# EAGLE board NSL_CylonIII (EAGLE 5.11)
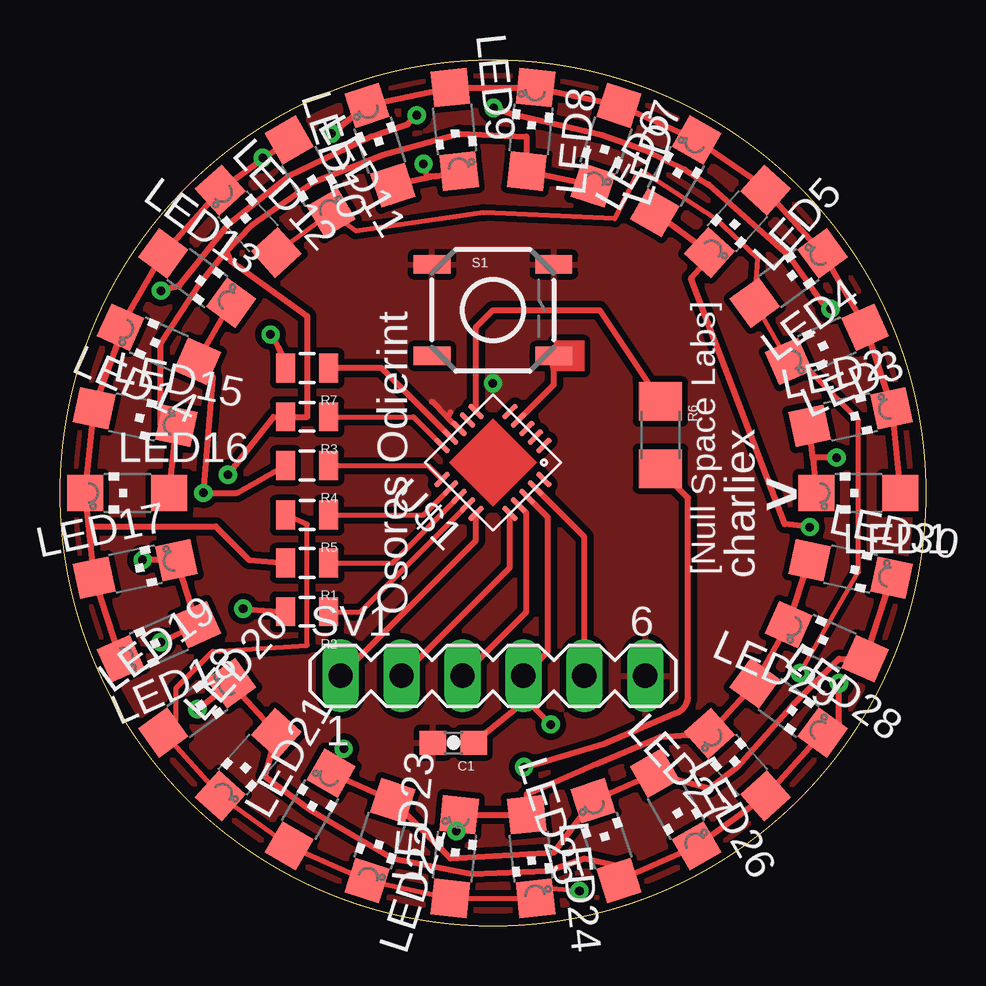
[diagram p0: board, top side]
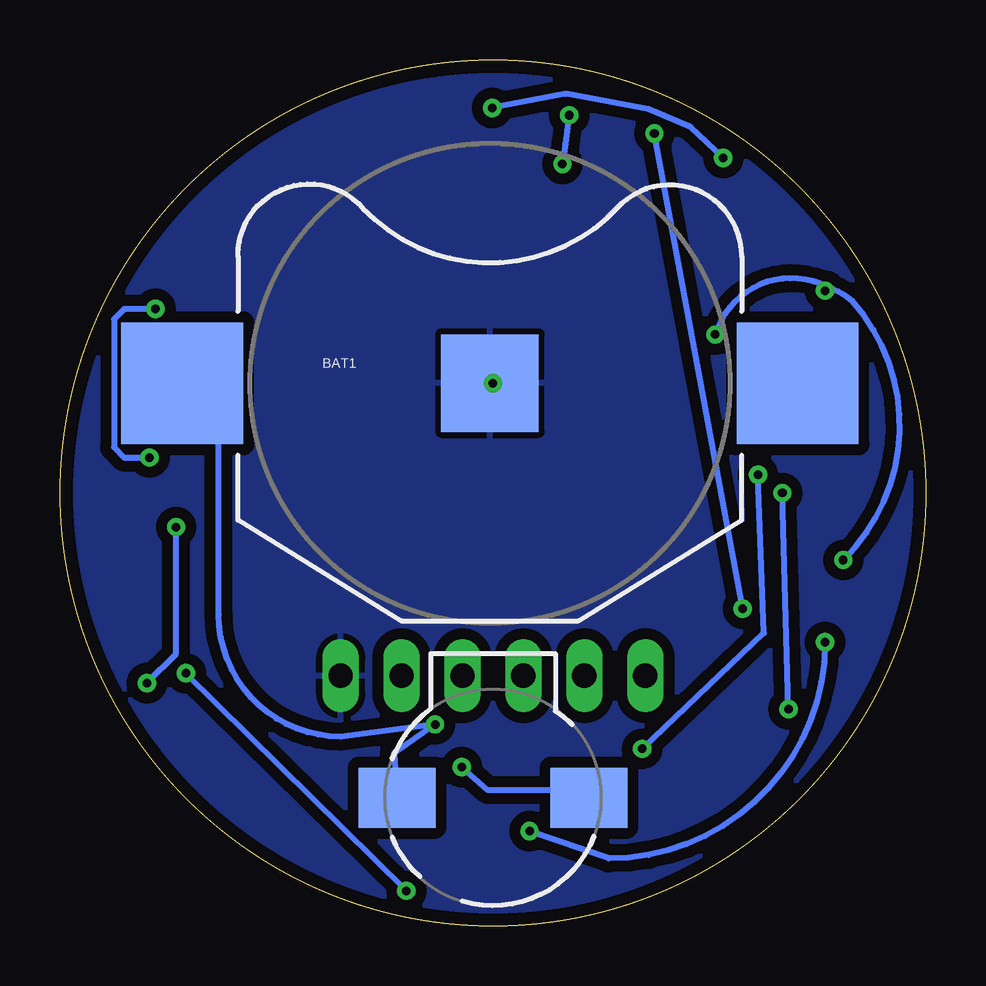
[diagram p1: board, bottom side, seen from below]

Size 36.1 x 36.1 mm. Coordinates in mm from the lower left corner, seen from the top.
Outline: circle at 18.05,18.05 radius 18.05
Copper layers (1*16): Top 0.0356mm / dielectric 1.5011mm / Bottom 0.0356mm
Design rules "SilverCircuits *": minimum track width 7mil, minimum drill 14mil, track to track 7mil, track to pad 7mil, pad to pad 7mil, via to via 7mil, smd to smd 0mil, copper to edge 20mil, drill to drill 8mil, minimum pad ring 10mil, minimum via ring 8mil, stop-mask expansion 4mil, vias tented up to drill 14mil, thermal gap 10mil
Net classes: 0 default: width 0.254 mm; 1 LED: width 0.203 mm

## Footprints (pad centres in the part's own frame; a part is rotated, then mirrored left to right if it is on the bottom)
SPARKFUN_BATTCON_20MM = smd 5.08 x 5.08: 1 -12.827,0; 3 12.827,0 | smd 4.064 x 4.064: 2 0,0
0603-CAP = smd 1.1 x 1: 1 -0.85,0; 2 0.85,0
CHIPLED_1206 = smd 1.5 x 1.5: A 0,-1.75; C 0,1.75
0805 = smd 0.8 x 1.2: 1 -0.9,0; 2 0.9,0
1206 = smd 1.6 x 1.8: 1 -1.4,0; 2 1.4,0
TACTILE_SWITCH_SMD = smd 1.524 x 0.762: 1 -2.54,1.905; 2 2.54,1.905; 3 -2.54,-1.905; 4 2.54,-1.905
BUZZER-CCV = smd 3.2 x 2.5: + 4,0; - -4,0
MA06-1 = drill 1.016 long: 1 -6.35,0; 2 -3.81,0; 3 -1.27,0; 4 1.27,0; 5 3.81,0; 6 6.35,0
MLF20 = smd 0.8 x 0.23: P$1 -2,1; P$2 -2,0.5; P$3 -2,0; P$4 -2,-0.5; P$5 -2,-1; P$11 2,-1; P$12 2,-0.5; P$13 2,0; P$14 2,0.5; P$15 2,1 | smd 0.23 x 0.8: P$6 -1,-2; P$7 -0.5,-2; P$8 0,-2; P$9 0.5,-2; P$10 1,-2; P$16 1,2; P$17 0.5,2; P$18 0,2; P$19 -0.5,2; P$20 -1,2

## Placement (x,y rotation side)
BAT1  [SPARKFUN_BATTCON_20MM]  18.18,22.62 0 bottom
C1  0.1uF  [0603-CAP]  16.4,7.64 180 top
LED1  [CHIPLED_1206]  33.29,18.05 90 top
LED2  [CHIPLED_1206]  32.96,21.22 282 top
LED3  [CHIPLED_1206]  31.97,24.25 114 top
LED4  [CHIPLED_1206]  30.38,27.01 306 top
LED5  [CHIPLED_1206]  28.25,29.38 138 top
LED6  [CHIPLED_1206]  25.67,31.25 330 top
LED7  [CHIPLED_1206]  22.76,32.54 162 top
LED8  [CHIPLED_1206]  19.64,33.21 354 top
LED9  [CHIPLED_1206]  16.46,33.21 186 top
LED10  [CHIPLED_1206]  13.34,32.54 18 top
LED11  [CHIPLED_1206]  10.43,31.25 210 top
LED12  [CHIPLED_1206]  7.85,29.38 42 top
LED13  [CHIPLED_1206]  5.72,27.01 234 top
LED14  [CHIPLED_1206]  4.13,24.25 66 top
LED15  [CHIPLED_1206]  3.14,21.22 258 top
LED16  [CHIPLED_1206]  2.81,18.05 90 top
LED17  [CHIPLED_1206]  3.14,14.88 282 top
LED18  [CHIPLED_1206]  4.13,11.85 114 top
LED19  [CHIPLED_1206]  5.72,9.09 306 top
LED20  [CHIPLED_1206]  7.85,6.72 138 top
LED21  [CHIPLED_1206]  10.43,4.85 330 top
LED22  [CHIPLED_1206]  13.34,3.56 162 top
LED23  [CHIPLED_1206]  16.46,2.89 354 top
LED24  [CHIPLED_1206]  19.64,2.89 186 top
LED25  [CHIPLED_1206]  22.76,3.56 18 top
LED26  [CHIPLED_1206]  25.67,4.85 210 top
LED27  [CHIPLED_1206]  28.25,6.72 42 top
LED28  [CHIPLED_1206]  30.38,9.09 234 top
LED29  [CHIPLED_1206]  31.97,11.85 66 top
LED30  [CHIPLED_1206]  32.96,14.88 258 top
R1  220  [0805]  10.3,15.13 180 top
R2  220  [0805]  10.3,13.1 180 top
R3  220  [0805]  10.3,21.23 180 top
R4  220  [0805]  10.3,19.19 180 top
R5  220  [0805]  10.3,17.13 180 top
R6  [1206]  25.03,20.46 270 top
R7  220  [0805]  10.3,23.26 180 top
S1  [TACTILE_SWITCH_SMD]  18.05,25.67 0 top
SG1  [BUZZER-CCV]  18.05,5.35 180 bottom
SV1  [MA06-1]  18.05,10.43 0 top
U$1  tiny2313  [MLF20]  18.05,19.32 225 top

## Library data of the parts
BAT1 R1-R5 R7 SV1 = NSL
C1 R6 S1 SG1 = SparkFun
LED1-LED30 = led
U$1 = NSL_Cylon

## Nets
GND: BAT1.2 C1.2 S1.1 S1.2 SV1.6 U$1.P$8
K0 [LED]: R5.1 U$1.P$12
K1 [LED]: R4.1 U$1.P$11
K2 [LED]: R3.1 U$1.P$10
K3 [LED]: R2.1 U$1.P$14
K4 [LED]: R1.1 U$1.P$13
K5: R7.1 U$1.P$9
MISO: SV1.2 U$1.P$16
MOSI: SV1.1 U$1.P$15
N$4: R6.2 SG1.-
PA0: U$1.P$3
PA1: U$1.P$2
PB0: LED7.C LED8.A LED15.C LED16.A LED21.C LED22.A LED25.C LED26.A LED29.A LED30.C R3.2
PB1: LED5.C LED6.A LED13.C LED14.A LED19.C LED20.A LED25.A LED26.C LED27.A LED28.C R4.2
PB2 [LED]: LED3.C LED4.A LED11.C LED12.A LED19.A LED20.C LED21.A LED22.C LED23.A LED24.C R5.2
PB3: LED1.C LED2.A LED11.A LED12.C LED13.A LED14.C LED15.A LED16.C LED17.A LED18.C R1.2
PB4: LED1.A LED2.C LED3.A LED4.C LED5.A LED6.C LED7.A LED8.C LED9.A LED10.C R2.2
PD2: S1.4 U$1.P$4
PD3: U$1.P$5
PD4: R6.1 U$1.P$6
PD6: LED9.C LED10.A LED17.C LED18.A LED23.C LED24.A LED27.C LED28.A LED29.C LED30.A R7.2
RST: SV1.5 U$1.P$19
RXD: U$1.P$20
SCK: SV1.3 U$1.P$17
TXD: U$1.P$1
VCC: BAT1.1 C1.1 SG1.+ SV1.4 U$1.P$18

## Tracks (layer width: path | path; a pad name or v marks a point on that pad's centre or on a via)
GND  (via drill 0.36)
  Top 0.254: U$1.P$8 16.14,21.23 | 16.14,21.23 15.51,21.86 | 16.14,21.23 16.22,21.3 16.28,21.42
  Bottom 0.254: BAT1.2 v18.05,22.62
  pour Top (isolate 0.254): 35.83,18.79 arc90 18.79,35.83 17.36,35.83 arc90 0.27,18.74 0.27,17.31 arc90 17.31,0.27 18.56,0.27 arc90 35.83,17.54
  pour Bottom (isolate 0.457): 35.83,18.79 arc90 18.79,35.83 17.36,35.83 arc90 0.27,18.74 0.27,17.31 arc90 17.31,0.27 18.56,0.27 arc90 35.83,17.54
K0
  Top 0.203: U$1.P$12 15.15,17.13 R5.1
K1
  Top 0.203: U$1.P$11 15.35,19.19 R4.1
K2
  Top 0.203: U$1.P$10 14.73,21.23 R3.1
K3
  Top 0.203: U$1.P$14 12.53,13.1 R2.1
K4
  Top 0.203: U$1.P$13 13.86,15.13 R1.1
K5
  Top 0.254: U$1.P$9 13.41,23.26 R7.1
MISO
  Top 0.254: SV1.2 18.76,14.95 U$1.P$16
MOSI
  Top 0.254: SV1.1 17.34,16.07 U$1.P$15
N$4  (via drill 0.36)
  Top 0.254: v19.34,6.62 20.28,6.87 22.65,7.59 25.62,8.86 arc73 26.18,9.52 26.18,17.85 25.16,18.86 R6.2
  Bottom 0.254: v19.34,6.62 18.25,5.66 14.19,5.66 SG1.-
PB0  (via drill 0.36)
  Top 0.254: LED30.C LED29.A 32.48,11.14 30.5,9.16 28.21,6.62 27.07,5.73 LED26.A LED25.C 20.59,3.06 16.27,2.81 14.24,4.86 arc90 LED22.A LED21.C v11.83,7.38 | LED16.A LED15.C 4.21,20.85 4.21,24.27 5.86,26.81 6.84,28.04 | LED7.C LED8.A 19.45,32.91 16.65,33.04 13.48,32.15 10.56,31 8.02,29.23 6.84,28.04 | v7,18.81 8.91,21.23 R3.2 10.3,21.23 10.3,25.42 7.1,27.74 6.97,28.04 6.84,28.04
  Bottom 0.254: v11.83,7.38 6.75,12.21 v7,18.81
PB1  (via drill 0.36)
  Top 0.254: LED13.C LED14.A 6.38,22.89 v5.98,18.05 7.38,18.05 R4.2 9.16,19.57 | LED6.A LED5.C 27.19,28.01 26.3,27.02 30.22,16.76 v31.26,16.63 | 8.94,8.13 LED19.C v5.73,9.03 | 8.94,8.13 9.16,7.89 | v32.48,10.12 32.48,8.5 32.07,8.09 LED28.C LED27.A LED26.C LED25.A 23.3,2.51 21.86,2.81 20.34,2.3 17.16,2.18 13.86,2.81 10.43,4.84 8.52,6.24 LED20.A 8.91,8.09 8.94,8.13
  Bottom 0.254: v5.73,9.03 v5.98,18.05 | v31.26,16.63 31.26,11.34 v32.48,10.12
PB2  (via drill 0.36)
  Top 0.203: LED12.A LED11.C 12.33,28.97 17.67,29.73 23.13,29.48 24.02,31.26 24.4,31.39 27.32,29.48 29.1,27.83 LED4.A LED3.C 30.44,23.13 31.26,23.13 33.29,21.1 33.29,14.75 v30.85,10.53 | R5.2 10.3,16.75 10.3,11.7 6.37,11.45 4.84,9.92 4.84,8.6 LED19.A LED20.C LED21.A LED22.C LED23.A LED24.C 19.88,1.18 20.28,1.59 v21.66,1.46
  Bottom 0.203: v21.66,1.46 v30.85,10.53
PB3  (via drill 0.36)
  Top 0.254: 8.48,31.98 LED12.C LED13.A LED14.C 2.81,25.16 2.75,25.18 | 8.48,31.98 LED11.A | 31.39,19.51 LED1.C | 31.39,19.51 LED2.A | LED18.C LED17.A 1.2,16.74 | 1.2,16.74 LED16.C LED15.A 2.75,25.18 | 2.75,25.18 2.91,25.61 | R1.2 7.89,15.26 6.49,16.65 1.29,16.65 1.2,16.74 | v32.38,19.52 31.51,19.52 31.39,19.51 | v32.12,25.72 31.74,26.03 31.41,26.48 30.39,27.93 27.04,30.9 26.05,31.54 24.35,32.35 22.57,32.98 19.09,33.8 19.02,33.8 v18.07,34.1 | 8.48,31.98 v8.45,32.02
  Bottom 0.254: v32.38,19.52 33.42,19.52 33.85,19.95 33.85,25.29 33.42,25.72 v32.12,25.72 | 8.5,31.97 v8.45,32.02 9.79,33.29 11.57,34.05 15,34.69 v18.07,34.1
PB4  (via drill 0.36)
  Top 0.254: 29.26,30.9 LED6.C LED7.A LED8.C LED9.A LED10.C v11.32,33.04 | 29.26,30.9 29.48,30.75 | LED1.A LED2.C LED3.A LED4.C LED5.A 29.23,30.85 29.26,30.9 | v7.64,13.22 R2.2
  Bottom 0.254: v7.64,13.22 v11.32,33.04
PD2
  Top 0.254: U$1.P$4 20.59,22.57 20.59,23.13 | 20.59,23.13 S1.4 | 20.59,23.13 arc90 19.95,23.77
PD4
  Top 0.254: 25.67,21.86 R6.1 22.5,25.67 18.05,25.67 17.34,24.96 U$1.P$6
PD6  (via drill 0.36)
  Top 0.254: LED30.A LED29.C LED28.A LED27.C 25.03,7.89 22.37,6.75 19.46,5.49 LED24.A LED23.C 16.64,4.58 arc-90 v16.53,3.95 | 15.69,31.26 LED10.A | 15.69,31.26 LED9.C | v3.44,15.26 3.45,15.25 LED17.C LED18.A v4.21,11.83 | v8.78,24.65 arc-23 R7.2 | v15.15,31.77 15.28,31.26 15.69,31.26 | 4.44,26.48 v4.21,26.48 4.97,26.69 7,29.23 9.54,31.26 12.97,32.91 14.49,33.42 v14.88,33.8
  Bottom 0.254: v3.44,15.26 arc-87 3.06,26.05 arc-20 4.12,26.64 | 4.12,26.64 arc-101 v8.78,24.65 | v4.21,11.83 arc90 13.22,2.81 v16.53,3.95 | v15.15,31.77 15.03,32.63 v14.88,33.8 | v4.21,26.48 4.18,26.51 4.12,26.64
RST
  Top 0.254: SV1.5 21.86,16.22 U$1.P$19
SCK
  Top 0.254: SV1.3 19.45,13.1 19.45,17.22 U$1.P$17
VCC  (via drill 0.36)
  Top 0.254: 19.32,9.33 SV1.4 20.34,11.45 20.34,17.03 U$1.P$18 | C1.1 19.32,9.33 | 19.32,9.33 19.41,9.41 v20.46,8.4 | U$1.P$18
  Bottom 0.254: SG1.+ 22.18,7.19 v20.46,8.4 24.4,7.89 arc90 29.48,12.97 29.48,21.1 arc-90 BAT1.1
(copper drawn outside any net)
  shapes: Top area x1

## Text on the board
tPlace: [Null Space Labs] | > | charliex | Osores Odierint